# Altium PCB AutomatskoOsetljenjeV2.PcbDoc
Units mm, origin at the board's own origin, x right, y up, seen from the top; angles counter-clockwise.
Board outline 60 x 100 mm, 2 copper layers (Top Layer, Bottom Layer); 65 components, 31 nets, 176 pads, 36 vias.
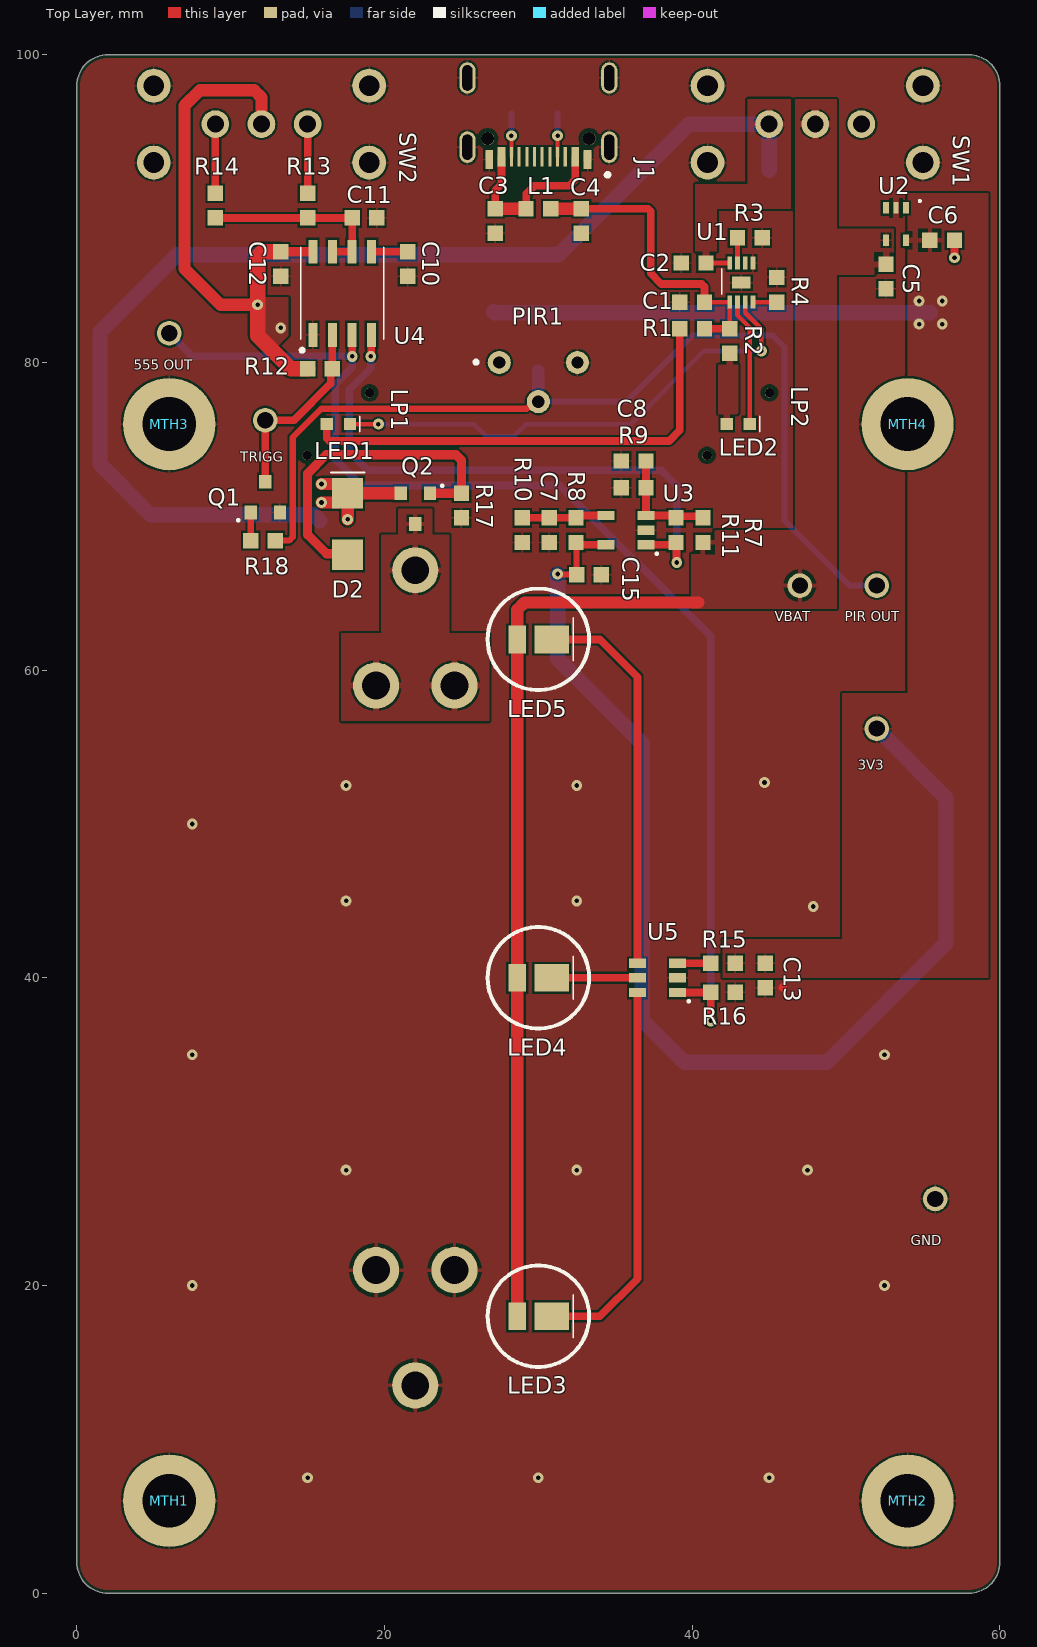
[diagram p0: Top Layer view]
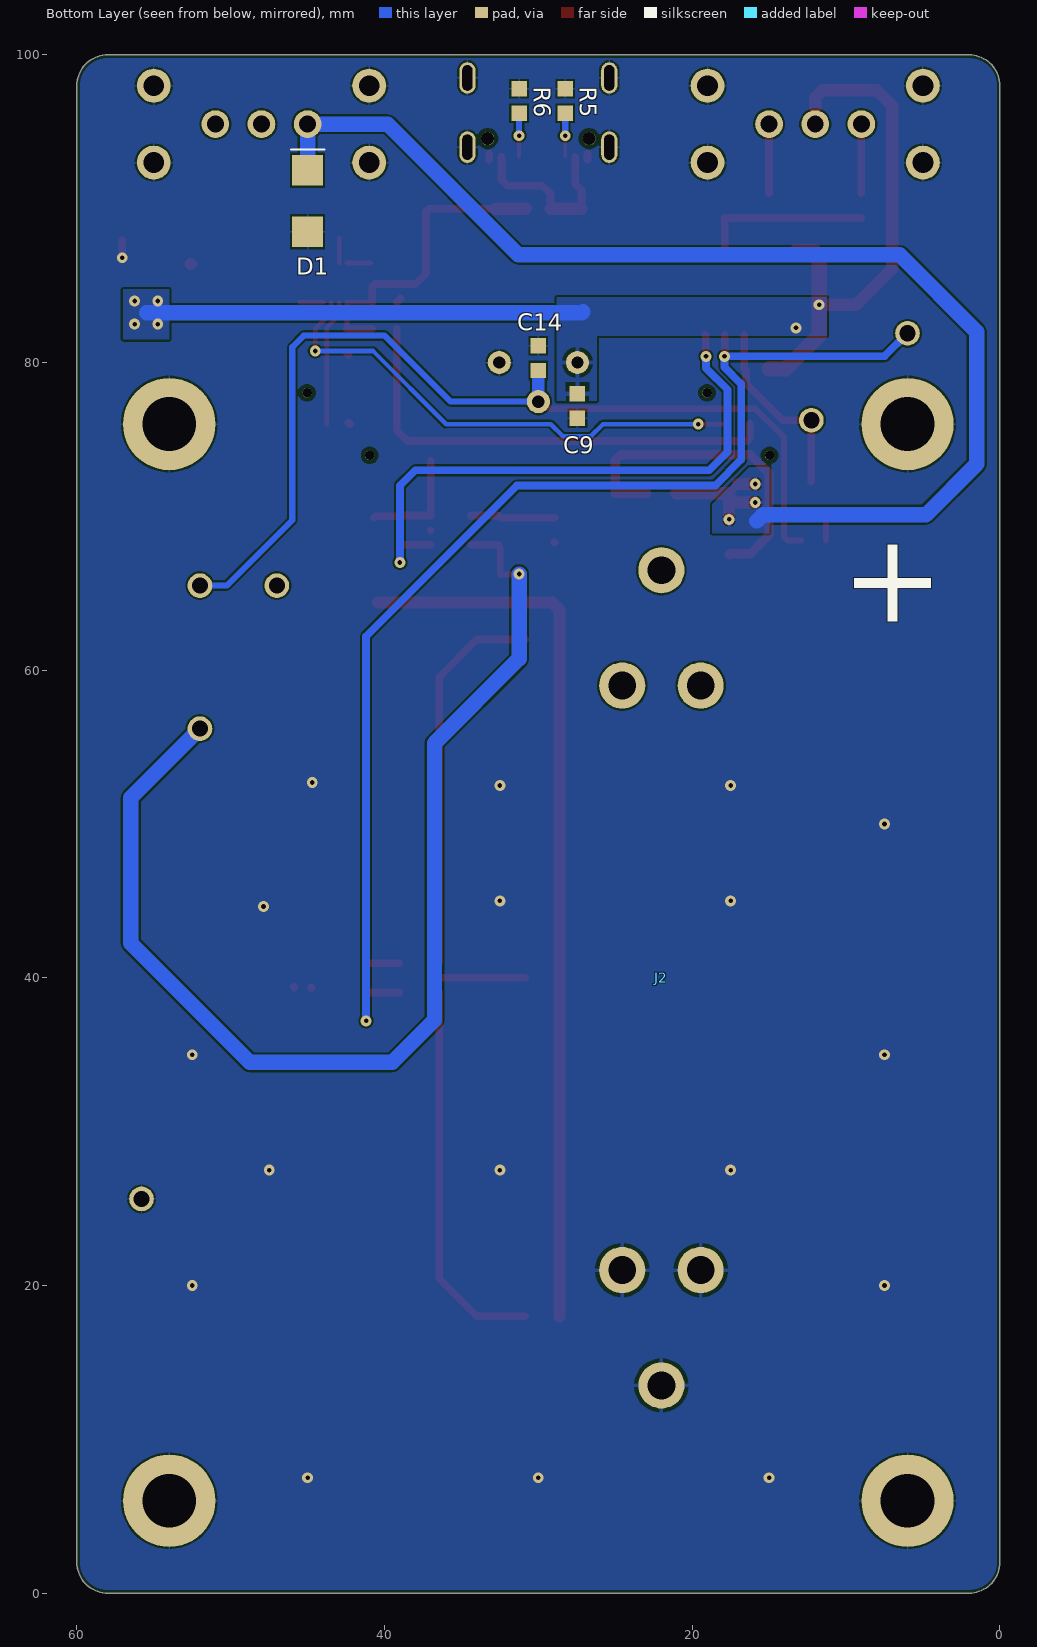
[diagram p1: Bottom Layer view, seen from below]

## Layer stack, top to bottom
Top Solder: solder mask 0.0102, Solder Resist, Dk 3.5
Top Layer: signal copper 0.0356
Dielectric 1: dielectric 0.32, FR-4, Dk 4.8
Bottom Layer: signal copper 0.0356
Bottom Solder: solder mask 0.0102, Solder Resist, Dk 3.5

## Board outline
2,0 cw(c2,2) 0,2 0,98 cw(c2,98) 2,100 58,100 cw(c58,98) 60,98 60,2 cw(c58,2) 58,0

## Design rules (kind name [scope] priority, off if disabled: settings)
BoardOutlineClearance [All] p1: gap=0.2 ignorepadtopadclearanceinfootprint=FALSE
Clearance [All] p1: gap=0.127 ignorepadtopadclearanceinfootprint=TRUE except(0.254: Arc-Hole Track-Hole SMDPad-Hole THPad-Hole Via-Hole Fill-Hole Poly-Hole Region-Hole Text-Hole)
ComponentClearance [All] p1: gap=0.127 collisioncheckmode=3 verticalgap=0.127 showdistances=TRUE
DiffPairsRouting [All] p1: maxlimit=0.254 minlimit=0.127 mostfreqgap=0.127 toplayer_minwidth=0.127 toplayer_maxwidth=25.4 toplayer_prefwidth=0.127 bottomlayer_minwidth=0.127 bottomlayer_maxwidth=25.4 bottomlayer_prefwidth=0.127 maxuncoupledlength=12.7
Height [All] p1: minheight=0 maxheight=1816.048 prefheight=12.7
HoleSize [All] p1: absolutevalues=TRUE maxlimit=6.3 minlimit=0.3 maxpercent=80.000 minpercent=20.000
HoleToHoleClearance [All] p1: gap=0.254 allowstackedmicrovias=FALSE
MinimumAnnularRing [All] p1: minimumring=0.152
MinimumSolderMaskSliver [All] p1: minsoldermaskwidth=0.152
PlaneClearance [All] p1: clearance=0.127
PlaneConnect PlaneConnectPowerPads [InPadClass('PowerPads')] p1: planeconnectstyle=Direct reliefexpansion=0.508 reliefentries=4 reliefconductorwidth=0.254 reliefairgap=0.254
PlaneConnect [All] p2: pad.planeconnectstyle=Relief pad.reliefexpansion=0.3 pad.reliefentries=4 pad.reliefconductorwidth=0.127 pad.reliefairgap=0.127 via.planeconnectstyle=Direct via.reliefexpansion=0.3 via.reliefentries=4 via.reliefconductorwidth=0.127 via.reliefairgap=0.127
PolygonConnect PolygonConnectPowerPads [All vs (InPadClass('PowerPads'))] p1: connectstyle=Relief reliefconductorwidth=0.254 reliefentries=4 polygonreliefangle="90 Angle" airgapwidth=0.254
PolygonConnect [All] p2: thpad.connectstyle=Relief thpad.reliefconductorwidth=0.127 thpad.reliefentries=4 thpad.polygonreliefangle="90 Angle" thpad.airgapwidth=0.127 smdpad.connectstyle=Relief smdpad.reliefconductorwidth=0.127 smdpad.reliefentries=4 smdpad.polygonreliefangle="90 Angle" smdpad.airgapwidth=0.127 via.connectstyle=Direct via.reliefconductorwidth=0.127 via.reliefentries=4 via.polygonreliefangle="90 Angle" via.airgapwidth=0.127
RoutingVias [All] p1: holewidth=0.3 width=0.6 viastyle="Through Hole" minholewidth=0.3 minwidth=0.6 maxholewidth=0.6 maxwidth=6.6
SilkToSilkClearance [All] p1: silktosilkclearance=0.127
SilkToSolderMaskClearance [IsPad] p1: minsilkscreentomaskgap=0.127 clearancetoexposedcopper=TRUE
SolderMaskExpansion [All] p1: expansion=0.051 istentingtop=FALSE
UnRoutedNet [All] p1: checkbadconnections=TRUE
Width Width_10mil [All] p1: maxlimit=25.4 minlimit=0.254 preferedwidth=0.254 minimp=50.000000 maximp=50.000000 favimp=50.000000
Width Width_6mil [All] p2: maxlimit=25.4 minlimit=0.152 preferedwidth=0.152 minimp=50.000000 maximp=50.000000 favimp=50.000000
Width Power_20mil [All] p3: maxlimit=25.4 minlimit=0.508 preferedwidth=0.508 minimp=50.000000 maximp=50.000000 favimp=50.000000
Width Power_12mil [All] p4: maxlimit=25.4 minlimit=0.305 preferedwidth=0.305 minimp=50.000000 maximp=50.000000 favimp=50.000000
Width Width_5mil [All] p5: maxlimit=25.4 minlimit=0.127 preferedwidth=0.127 minimp=50.000000 maximp=50.000000 favimp=50.000000
19 further rules are at their usual default settings.

## Components (designator, comment, footprint, x,y, rotation, side; value= is the part's Value field where it differs from the comment)
3V3 "TESTPOINT" TESTPOINT 52,56.2 r0 top locked (schematic designator TP2)
"555 OUT" "TESTPOINT" TESTPOINT 6,81.9 r0 top locked (schematic designator TP4)
C1 "1uF/16V" CAP_0603 40,83.93 r0 top locked
C2 "2.2uF/16V" CAP_0603 40.1,86.47 r0 top locked
C3 "10nF/10V" CAP_0603 27.2,89.2 r90 top locked
C4 "100nF/16V" CAP_0603 32.8,89.2 r90 top locked
C5 "1uF/16V" CAP_0603 52.6,85.6 r90 top locked
C6 "1uF/16V" CAP_0603 56.25,87.95 r180 top locked
C7 "1nF/100V" CAP_0603 30.7,69.1 r90 top locked
C8 "1nF/100V" CAP_0603 36.2,73.6 r0 top locked
C9 "100nF/16V" CAP_0603 27.46,77.175 r90 bottom locked
C10 "10nF/10V" CAP_0603 21.5,86.4 r90 top locked
C11 "10uF/10V" CAP_0603 18.7,89.4 r180 top locked
C12 "100nF/16V" CAP_0603 13.25,86.4 r90 top locked
C13 "1uF/16V" CAP_0603 44.75,40.15 r90 top locked
C14 "330pF/50V" CAP_0603 30,80.285 r270 bottom locked
C15 "100nF/16V" CAP_0603 33.3,66.2 r180 top locked
D1 "ZENER/5.1V" ZENER_SMA 45,90.5 r270 bottom locked
D2 "ZENER/5.1V" ZENER_SMA 17.6,69.5 r270 top locked
GND "TESTPOINT" TESTPOINT 55.8,25.625 r0 top locked (schematic designator TP5)
J1 "GSB1C4K11DVHR" USBC_GSB1C4K11DVHR 30,97 r180 top locked
J2 "12BHC186CLP-GR" BATTERY_HOLDER_18650 22,40 r270 bottom locked
L1 "33R/100MHz" INDC_0603 30,90 r0 top locked
LED1 "150060RS75000" LED_0603 17,76 r180 top locked
LED2 "150060VS75000" LED_0603 43,76 r180 top locked
LED3 "JB2835BWT-N-U65EA0000-N000P001" LED_1411 30,18 r180 top locked
LED4 "JB2835BWT-N-U65EA0000-N000P001" LED_1411 30,40 r180 top locked
LED5 "JB2835BWT-N-U65EA0000-N000P001" LED_1411 30,62 r180 top locked
LP1 "LIGHT_PIPE" LIGHT_PIPE_VLP-400-F 17,76 r0 top locked
LP2 "LIGHT_PIPE" LIGHT_PIPE_VLP-400-F 43,76 r0 top locked
MTH1 "MTH" MOUNTING_HOLE_M3 6,6 r0 top locked
MTH2 "MTH" MOUNTING_HOLE_M3 54,6 r0 top locked
MTH3 "MTH" MOUNTING_HOLE_M3 6,76 r0 top locked
MTH4 "MTH" MOUNTING_HOLE_M3 54,76 r0 top locked
PIR1 "AM312" AM312 30,80 r0 top locked
"PIR OUT" "TESTPOINT" TESTPOINT 52,65.5 r0 top locked (schematic designator TP6)
Q1 "BSS806NH6327XTSA1" SOT23-3 12.25,71.25 r0 top locked
Q2 "TSM650P02CX RFG" SOT23-3 22,70.5 r180 top locked
R1 "250R/0.1%" RES_0603 40,82.2 r0 top locked
R2 "250R/0.1%" RES_0603 42.438,81.4 r90 top locked
R3 "3K3/1%" RES_0603 43.746,88.1 r180 top locked
R4 "1K/1%" RES_0603 45.5,84.73 r270 top locked
R5 "5.1K/1%" RES_0603 28.251,97 r270 bottom locked
R6 "5.1K/1%" RES_0603 31.251,97 r270 bottom locked
R7 "10K/1%" RES_0603 40.7,69.1 r270 top locked
R8 "10K/1%" RES_0603 32.45,69.1 r270 top locked
R9 "9.1K/1%" RES_0603 36.2,71.85 r0 top locked
R10 "10K/1%" RES_0603 28.95,69.1 r90 top locked
R11 "300K/1%" RES_0603 38.95,69.1 r270 top locked
R12 "10K/1%" RES_0603 15.8,79.6 r180 top locked
R13 "1M/1%" RES_0603 15,90.2 r90 top locked
R14 "270k/1%" RES_0603 9,90.2 r90 top locked
R15 "9.1K/1%" RES_0603 42,40.95 r180 top locked
R16 "100K/1%" RES_0603 42,39.05 r180 top locked
R17 "100K/1%" RES_0603 25,70.7 r90 top locked
R18 "100R/1%" RES_0603 12.1,68.425 r180 top locked
SW1 "SK-12F17-G 7" SWITCH_SK-12F17-G_HORIZONTAL 48,95.5 r180 top locked
SW2 "SWITCH_MAIN" SWITCH_SK-12F17-G_HORIZONTAL 12,95.5 r180 top locked
TRIGG "TESTPOINT" TESTPOINT 12.25,76.25 r0 top locked (schematic designator TP3)
U1 "MC34673AEPR2" "UDFN 8" 43.2,85.2 r90 top locked
U2 "STLQ50/3.3V" SOT323-5 53.25,89 r180 top locked
U3 "TLV3201AIDBVT" SOT23-5 35.7,69.1 r180 top locked
U4 "TLC555IDR" 8-SOIC 17.25,84.5 r90 top locked
U5 "MAX1916EZT+T" SOT23-6 37.75,40 r180 top locked
VBAT "TESTPOINT" TESTPOINT 47,65.5 r0 top locked (schematic designator TP1)

## Footprints (in the part's own frame and the unit in brackets; to place one, negate y for a bottom-side part, rotate by r counter-clockwise, add the part's x,y. Pads: shape width x height; smd on the part's side, far side on the other; paste and mask are expansions set on the pad)
8-SOIC [mm]
  rect 1.55x0.6 smd: 1(-2.7,1.905) 2(-2.7,0.635) 3(-2.7,-0.635) 4(-2.7,-1.905) 5(2.7,-1.905) 6(2.7,-0.635) 7(2.7,0.635) 8(2.7,1.905)
  silkscreen extent -3.8,-2.7 3,2.7, body extent -3,-2.45 3,2.45, height 1.75
AM312 [mm]
  round 1.5 hole 0.8: 1(-2.54,0) 2(0,-2.54) 3(2.54,0)
  silkscreen extent -4.15,-0.07 -3.95,0.12, body extent -6.7,-6.7 6.7,6.7, height 10
BATTERY_HOLDER_18650 [mm]
  round 3 hole 1.8: 1(-26.5,0) 1(-19,-2.55) 1(-19,2.55) 2(19,-2.55) 2(19,2.55) 2(26.5,0)
  body extent -34.87,-9.58 34.87,9.58, height 19.43
CAP_0603 [mm]
  rect 1x1 smd: 1(-0.8,0) 2(0.8,0)
  body extent -0.8,-0.43 0.8,0.43, height 0.6
INDC_0603 [mm]
  rect 1x1 smd: 1(-0.8,0) 2(0.8,0)
  body extent -0.8,-0.43 0.8,0.43, height 0.6
LED_0603 [mm]
  rect 0.8x0.8 smd: 1(0.75,0) 2(-0.75,0)
  silkscreen extent -1.4,-0.5 -1.4,0.5, body extent -0.8,-0.4 0.8,0.4, height 0.8
LED_1411 [mm]
  rect 1.15x1.8 smd: 1(1.37,0)
  rect 2.25x1.8 smd: 2(-0.87,0)
  silkscreen extent -2.27,-1.4 -2.27,1.4, body extent -1.75,-1.4 1.75,1.4, height 0.71
LIGHT_PIPE_VLP-400-F [mil]
  round 24 hole 24: 1(-80,-80) 1(80,80)
  body extent -92,-92 92,93, height 400
MOUNTING_HOLE_M3 [mm]
  round 6 hole 3.5: 1(0,0)
RES_0603 [mm]
  rect 1x1 smd: 1(-0.8,0) 2(0.8,0)
  body extent -0.8,-0.43 0.8,0.43, height 0.6
SOT23-3 [mm]
  rect 0.8x0.9 smd: 1(-0.95,-1) 2(0.95,-1) 3(0,1)
  silkscreen extent -1.77,-1.52 -1.73,-1.48, body extent -1.52,-1.32 1.52,1.32, height 1.22
SOT23-5 [mm]
  rect 1.1x0.6 smd: 1(-1.3,0.95) 2(-1.3,0) 3(-1.3,-0.95) 4(1.3,-0.95) 5(1.3,0.95)
  silkscreen extent -2.02,1.51 -1.98,1.54, body extent -1.4,-1.45 1.4,1.45, height 1.45
SOT23-6 [mm]
  rect 1.1x0.6 smd: 1(-1.3,0.95) 2(-1.3,0) 3(-1.3,-0.95) 4(1.3,-0.95) 5(1.3,0) 6(1.3,0.95)
  silkscreen extent -2.05,1.5 -2,1.55, body extent -1.4,-1.45 1.4,1.45, height 1.2
SOT323-5 [mm]
  rect 0.4x0.75 smd: 1(-0.65,-1.05) 3(0.65,-1.05) 4(0.65,1.05) 5(-0.65,1.05)
  rect 0.35x0.75 smd: 2(0,-1.05)
  silkscreen extent -1.55,-1.5 -1.55,-1.5, body extent -1.1,-1.09 1.1,1.29, height 1.09
SWITCH_SK-12F17-G_HORIZONTAL [mm]
  round 1.8 hole 1.1: 1(0,0) 2(-3,0) 3(3,0)
  round 2.2 hole 1.35: 4(-7,-2.5) 4(-7,2.5) 4(7,-2.5) 4(7,2.5)
  body extent -7.56,-8.17 7.56,2.8, height 8.07
TESTPOINT [mm]
  round 1.6 hole 1.05: 1(0,0)
  body extent -1.27,-1.27 1.27,1.27, height 4.57
"UDFN 8" [mil]
  rect 34x12 smd mask+0.79: 1(-50,29.53) 2(-50,9.84) 3(-50,-9.84) 4(-50,-29.53) 5(50,-29.53) 6(50,-9.84) 7(50,9.84) 8(50,29.53)
  rect 31x47 smd: 9(0,0)
  silkscreen extent -30,50 35,50, body extent -60,-40 60,40, height 19
USBC_GSB1C4K11DVHR [mm]
  rect 0.5x1.25 smd mask+0.05: A1_B12(-3.2,3.8) A4_B9(-2.4,3.625) B1_A12(3.2,3.8) B4_A9(2.4,3.625)
  rect 0.2x1.25 smd mask+0.05: A5(-1.25,3.625) A6(-0.25,3.625) A7(0.25,3.625) A8(1.25,3.625) B5(1.75,3.625) B6(0.75,3.625) B7(-0.75,3.625) B8(-1.75,3.625)
  oval 1.05x2.05 hole 0.65 slot 1.65 at 90 deg: SH(-4.61,3) SH(-4.61,-1.5) SH(4.61,3) SH(4.61,-1.5)
  round 0.85 hole 0.85 unplated: ""(-3.3,2.44) ""(3.3,2.44)
  silkscreen extent -4.6,4.7 -4.4,4.9, body extent -4.74,-4.4 4.74,4, height 6.69
ZENER_SMA [mm]
  rect 2x2 smd: 1(2,0) 2(-2,0)
  silkscreen extent -3.35,-1.1 -3.35,1.1, body extent -2.6,-1.31 2.6,1.31, height 2.21

## Part data
3V3 "555 OUT" GND "PIR OUT" TRIGG VBAT: "White PC Test Point, Miniature Phosphor Bronze Silver Plating Through Hole Mounting Type", MPN=5002
C1 C5 C6 C13: "1 µF ±5% 16V Ceramic Capacitor X7R 0603 (1608 Metric)", MPN=0603YC105JAT2A
C2: "2.2 µF ±10% 16V Ceramic Capacitor X7S 0603 (1608 Metric)", MPN=GRM188C71C225KE11D
C3 C10: "10000 pF ±10% 50V Ceramic Capacitor X7R 0603 (1608 Metric)", MPN=0603B103K500CT
C4 C9 C12 C15: "0.1 µF ±10% 16V Ceramic Capacitor X7R 0603 (1608 Metric)", MPN=CC0603KRX7R7BB104
C7 C8: "1 µF ±10% 10V Ceramic Capacitor X7R 0603 (1608 Metric)", MPN=CL10B105KP8NNNC
C11: "10 µF ±10% 10V Ceramic Capacitor X5R 0603 (1608 Metric)", MPN=CL10A106KP8NNNC
C14: "330 pF ±10% 50V Ceramic Capacitor X7R 0603 (1608 Metric)", MPN=C0603C331K5RACTU
D1 D2: "Zener Diode 5.1 V 1.5 W ±5% Surface Mount SMA", MPN=1SMA5918BT3G
J1: library part USB_C_GSB1C4K11DVHR, "USB-C (USB TYPE-C) USB 2.0 Receptacle Connector 24 (16+8 Dummy) Position Through Hole, Right Angle", MPN=GSB1C4K11DVHR
J2: library part BATTERY_HOLDER_18650, "Cylindrical Battery Contacts, Clips, Holders & Springs 18650 Holder Board Mount Clip", MPN=12BHC186CLP-GR
L1: "33 Ohms @ 100 MHz 1 Power Line Ferrite Bead 0603 (1608 Metric) 3A 25mOhm", MPN=BLM18PG330SN1DBLM18PG330SN1D
LED1: library part INDICATION_LED_RED_1500_1, "Red 625nm LED Indication - Discrete 2V 0603 (1608 Metric)", MPN=150060RS75000
LED2: library part INDICATION_LED_GREEN_1500, "Green 570nm LED Indication - Discrete 2V 0603 (1608 Metric)", MPN=150060VS75000
LED3 LED4 LED5: library part "LED COOL WHITE", "LED Lighting J White, Cool 6500K 3-Step MacAdam Ellipse 2.7V 55mA 120° 1411 (3528 Metric)", MPN=JB2835BWT-N-U65EA0000-N000P001
LP1 LP2: "Light pipe for indication led", MPN=VLP-400-F
MTH1 MTH2 MTH3 MTH4: "Mounting hole"
PIR1: "AM312 PIR sensor", ComponentLink1Description=MPN, ComponentLink1URL=RAK12006-0-WB-N
Q1: library part BSS806NH6327XTSA1_NMOS, "N-Channel 20 V 2.3A (Ta) 500mW (Ta) Surface Mount PG-SOT23", MPN=BSS806NH6327XTSA1
Q2: library part "TSM650P02CX RFG PMOS", "P-Channel 20 V 4.1A (Tc) 1.56W (Tc) Surface Mount SOT-23", MPN="TSM650P02CX RFG"
R1 R2: "250 Ohms ±0.1% 0.1W, 1/10W Chip Resistor 0603 (1608 Metric) Thin Film", MPN=RT0603BRE07250RL
R3: "3.3 kOhms ±1% 0.1W, 1/10W Chip Resistor 0603 (1608 Metric) Automotive AEC-Q200 Thick Film", MPN=RMCF0603FT3K30
R4: "1 kOhms ±1% 0.1W, 1/10W Chip Resistor 0603 (1608 Metric) Moisture Resistant Thick Film", MPN=RC0603FR-071KL
R5 R6: "5.1 kOhms ±1% 0.1W, 1/10W Chip Resistor 0603 (1608 Metric) Moisture Resistant Thick Film", MPN=RC0603FR-075K1L
R7 R8 R10 R12: "10 kOhms ±1% 0.1W, 1/10W Chip Resistor 0603 (1608 Metric) Moisture Resistant Thick Film", MPN=CR0603-FX-1002ELF
R9 R15: "9.1 kOhms ±1% 0.1W, 1/10W Chip Resistor 0603 (1608 Metric) Thick Film", MPN=CRCW06039K10FKEAC
R11: "300 kOhms ±1% 0.1W, 1/10W Chip Resistor 0603 (1608 Metric) Automotive AEC-Q200 Thick Film", MPN=RMCF0603FT300K
R13: "1 MOhms ±1% 0.1W, 1/10W Chip Resistor 0603 (1608 Metric) Automotive AEC-Q200 Thick Film", MPN=RMCF0603FT1M00
R14: "270 kOhms ±1% 0.1W, 1/10W Chip Resistor 0603 (1608 Metric) Automotive AEC-Q200 Thick Film", MPN=ERJ-3EKF2703V
R16 R17: "100 kOhms ±1% 0.1W, 1/10W Chip Resistor 0603 (1608 Metric) Automotive AEC-Q200 Thick Film", MPN=ERJ-3EKF1003V
R18: "100 Ohms ±1% 0.1W, 1/10W Chip Resistor 0603 (1608 Metric) Automotive AEC-Q200 Thick Film", MPN=ERJ-3EKF1000V
SW1: library part SWITCH_MAIN, "SWITCH SLIDE SPDT 300MA 30V", MPN="SK-12F17-G 7"
SW2: "SWITCH SLIDE SPDT 300MA 30V", MPN="SK-12F17-G 7"
U1: "Charger IC Lithium Ion/Polymer 8-UDFN (3x2)", MPN=MC34673AEPR2
U2: library part REG-STLQ50/3.3V, "IC REG LINEAR 3.3V 50MA SOT323-5", MPN=STLQ50C33R
U3: library part TLV3201AIDBVT_COMPARATOR, "Comparator General Purpose Push-Pull SOT-23-5", MPN=TLV3201AIDBVT
U4: "555 Type, Timer/Oscillator (Single) IC 2.1MHz 8-SOIC", MPN=TLC555IDR
U5: library part "LED DRIVER MAX1916", "LED Driver IC 3 Output Linear Dimming 60mA TSOT-23-6", MPN=MAX1916EZT+T

## Via types
v1: diameter 0.7, hole 0.3, Top Layer to Bottom Layer, tented both sides, 35 vias
v2: diameter 0.7, hole 0.3, Top Layer to Bottom Layer, 1 vias

## Nets (pads, with @x,y where several pads share a name; then routed paths per layer and width w, separated by ;. In a path a pad name is that pad's centre, name@x,y a point inside that pad or via, vN(x,y) a via of type N, cw(c..) or ccw(c..) an arc to the next point about the centre after c; other vN are vias at no path point)
555_SIGNAL: "555 OUT.1" R16.2 U4.3 U5.1 | length 79.2
  Top Layer w0.5: U4.3 17.893,81.793 17.893,80.407 v1(17.9,80.4) ; U5.1 R16.2 v1(41.2,37.2)
  Bottom Layer w0.5: 6,81.9 7.5,80.4 v1(17.9,80.4) 17.9,79.7 16.8,78.6 16.8,73.7 18.5,72 31.4,72 41.2,62.2 v1(41.2,37.2)
+3V3: 3V3.1 C6.2 C9.2 C12.2 C13.2 C15.2 PIR1.1 R8.2 R12.2 R15.1 SW2.1 U2.5 U3.5 U4.8 | length 141.3
  Top Layer w0.4: v2(31.25,66.25) 31.275,66.225 C15.2@32.475,66.225 ; C15.2 C15.2@32.475,66.225 ; R8.2@32.6,68.15 32.475,68.025 C15.2@32.475,66.225
  Top Layer w0.5: R8.2@32.6,68.15 U3.5
  Top Layer w0.6: C12.2 U4.8
  Top Layer w0.8: v1(11.75,83.75) 9.35,83.75 7,86.1 7,96.7 8,97.7 11.531,97.7 12,97.231 SW2.1
  Top Layer w1: C12.2 12.043,87.2 11.75,86.907 v1(11.75,83.75) 11.75,81.75 13.9,79.6 R12.2
  Bottom Layer w1: 27.1,83.3 27.175,83.225 55.475,83.225 ; v2(31.25,66.25) 31.25,60.75 36.75,55.25 36.75,37.25 39.5,34.5 48.75,34.5 56.5,42.25 56.5,51.7 3V3.1
  other v1: 13.25,82.25 54.75,82.5 56.25,82.5 54.75,84 56.25,84
+BAT: C2.2 D1.2 D2.2 Q2.2 SW1.3 U1.8 | length 87.1
  Top Layer w0.3: C2.2 U1.8@42.438,86.47
  Top Layer w0.5: D2.2@17,70.9 D2.2 D2.2@17,72.1
  Top Layer w0.8: v1(15.9,70.9) D2.2@17,70.9 ; v1(15.9,72.1) D2.2@17,72.1 ; v1(17.6,69.8) D2.2 Q2.2
  Bottom Layer w1: 15.8,69.7 15.4,70.1 4.8,70.1 1.5,73.4 1.5,82 6.5,87 31.3,87 39.8,95.5 SW1.3 D1.2
CHG: LED1.2 U1.3 | length 33
  Top Layer w0.3: LED1.2 v1(19.6,76) ; U1.3@43.454,83.93 43.454,83.246 44.5,82.2 v1(44.5,80.75)
  Bottom Layer w0.3: v1(19.6,76) 25.8,76 26.6,75.2 28.4,75.2 29.2,76 36,76 40.75,80.75 v1(44.5,80.75)
GND: C1.1 C2.1 C3.1 C4.1 C5.1 C6.1 C7.1 C8.1 C9.1 C10.1 C11.1 C12.1 C13.1 C14.1 C15.1 D1.1 GND.1 J1.A1_B12 J1.B1_A12 J1.SH J2.2 MTH1.1 MTH2.1 MTH3.1 MTH4.1 PIR1.3 Q1.2 R3.1 R4.1 R5.1 R6.1 R9.1 R10.1 R16.1 R17.1 SW1.4 SW2.4 U1.5 U1.9 U2.2 U3.2 U4.1 U5.2 | length 3.8
  Top Layer w0.5: SW2.4@19,92.54 SW2.4@19,93 ; J1.SH@25.39,94 25.39,93.829 J1.SH@25.644,93.575 ; J1.B1_A12 J1.B1_A12@26.8,93.575 ; J1.A1_B12 J1.A1_B12@33.2,93.575 ; J1.SH@34.356,93.575 34.61,93.829 J1.SH@34.61,94 ; C1.1@38.966,84.164 C1.1 ; C13.1 C13.1@44.775,39.375 ; 45.875,39.375 45.9,39.4 ; C6.1 57.053,87.947 57.053,86.807 v1(57.056,86.804)
  other v1: 15,7.5 30,7.5 45,7.5 7.5,20 52.5,20 17.5,27.5 32.5,27.5 47.5,27.5 7.5,35 52.5,35 47.866,44.634 17.5,45 32.5,45 7.5,50 17.5,52.5 32.5,52.5 44.7,52.7
NetC7_2: C7.2 R8.1 R10.2 U3.4 | length 5.5
  Top Layer w0.5: R10.2 C7.2 R8.1 32.6,70.05 U3.4
NetC8_2: C8.2 R7.1 R9.2 R11.1 U3.3 | length 7.5
  Top Layer w0.5: C8.2 R9.2 U3.3 38.8,70.05 R11.1 38.95,70 40.6,70 R7.1
NetC10_2: C10.2 U4.5 | length 2.3
  Top Layer w0.5: U4.5 C10.2
NetC11_2: C11.2 R13.1 R14.1 U4.6 U4.7 | length 12.4
  Top Layer w0.5: R14.1 C11.2 ; U4.7 U4.6 17.893,87.208 C11.2@17.893,89.393
NetD2_1: D2.1 Q2.1 R17.2 | length 22
  Top Layer w0.6: D2.1 17.534,67.566 16.234,67.566 15,68.8 15,72.785 16.215,74 24.649,74 25,73.649 R17.2 Q2.1
NetJ1_A5: J1.A5 R6.2 | length 2.8
  Top Layer w0.254: J1.A5 v1(31.25,94.75)
  Bottom Layer w0.4: v1(31.25,94.75) R6.2@31.25,96.2
NetJ1_B5: J1.B5 R5.2 | length 2.8
  Top Layer w0.254: J1.B5 v1(28.25,94.75)
  Bottom Layer w0.254: R5.2 R5.2
  Bottom Layer w0.4: v1(28.25,94.75) R5.2
NetJ2_1: J2.1 Q2.3
NetLED1_1: LED1.1 R1.1 | length 30.8
  Top Layer w0.5: LED1.1 16.25,75.076 16.426,74.9 38.5,74.9 39.2,75.6 R1.1
NetLED2_1: LED2.1 R2.1 | length 0.3
  Top Layer w0.5: LED2.1 LED2.1@42.344,76.094 ; R2.1@42.344,80.506 R2.1
NetLED3_2: LED3.2 U5.6 | length 25.2
  Top Layer w0.5: LED3.2 34,18 36.45,20.45 U5.6
NetLED4_2: LED4.2 U5.5 | length 5.6
  Top Layer w0.5: LED4.2 U5.5
NetLED5_2: LED5.2 U5.4 | length 25.2
  Top Layer w0.5: LED5.2 34,62 36.45,59.55 U5.4
NetQ1_1: Q1.1 R18.2 | length 1.8
  Top Layer w0.4: R18.2 Q1.1
NetQ1_3: Q1.3 R12.1 TRIGG.1 U4.2 | length 12.4
  Top Layer w0.5: Q1.3 TRIGG.1 14.114,76.25 16.507,78.643 16.507,79.507 R12.1 ; R12.1@16.608,79.608 16.608,81.793 U4.2
NetR3_2: R3.2 U1.7 | length 1.6
  Top Layer w0.3: U1.7@42.946,86.47 R3.2
NetR4_2: R4.2 U1.4 | length 1.5
  Top Layer w0.3: U1.4@43.962,83.93 R4.2
NetR11_2: R11.2 U3.1 U4.4 | length 38.7
  Top Layer w0.5: v1(19.1,80.4) 19.128,80.427 19.128,81.773 U4.4 ; U3.1 38.8,68.15 R11.2 38.975,68.275 38.975,67.025 v1(39,67)
  Bottom Layer w0.5: v1(19.1,80.4) 19.1,79.625 17.7,78.225 17.7,74.2 18.9,73 38,73 39,72 v1(39,67)
NetR13_2: R13.2 SW2.2 | length 4.5
  Top Layer w0.5: R13.2 SW2.2
NetR14_2: R14.2 SW2.3 | length 4.5
  Top Layer w0.5: R14.2 SW2.3
NetR15_2: R15.2 U5.3 | length 2.1
  Top Layer w0.5: U5.3 R15.2
PIR: "PIR OUT.1" C14.2 PIR1.2 R18.1 | length 63.8
  Top Layer w0.4: R18.1 13.795,68.425 14.029,68.659 14.029,75.129 15.9,77 29.242,77 29.702,77.46 PIR1.2
  Bottom Layer w0.4: PIR1.2 35.71,77.46 40,81.75 45.25,81.75 46,81 46,69.75 50.25,65.5 52,65.5
  Bottom Layer w0.8: PIR1.2 C14.2
PPR: LED2.2 U1.2 | length 8.3
  Top Layer w0.3: U1.2@42.946,83.93 42.946,83.084 43.75,82.28 LED2.2
VBAT: C5.2 LED3.1 LED4.1 LED5.1 R7.2 SW1.1 U2.4 VBAT.1 | length 57.9
  Top Layer w0.8: LED3.1 LED4.1 LED5.1 28.63,63.931 29.099,64.4 40.4,64.4
VBUS: C3.2 J1.A4_B9 J1.B4_A9 L1.1 | length 11.6
  Top Layer w0.5: C3.2 27.2,91.2 27.6,91.6 J1.B4_A9 ; L1.1 29.207,90.007 29.207,90.957 29.75,91.5 32,91.5 32.4,91.9 J1.A4_B9
  Top Layer w0.8: C3.2 L1.1
VBUS_FILTER: C1.2 C4.2 L1.2 R1.2 R2.2 U1.1 | length 20.5
  Top Layer w0.3: C1.2 42.438,83.93 R2.2
  Top Layer w0.5: C4.2 37.124,90 37.3,89.824 37.3,85.8 38,85.1 40.624,85.1 40.8,84.924 C1.2 ; R1.2 R2.2
  Top Layer w0.8: L1.2 C4.2
pads on no net: J1. J1.A6 J1.A7 J1.A8 J1.B6 J1.B7 J1.B8 LP1.1 LP2.1 SW1.2 U1.6 U2.1 U2.3

## Polygon pours and split planes (outlines as drawn)
+3V3 on Top Layer "+3V3_L01_P008" (solid, pour order 8): 54,58.5 49.75,58.5 49.75,42.5 42,42.5 42,40 54,40 59.25,40 59.25,91 54,91
GND on Top Layer "GND_L01_P028" (solid, remove dead copper, pour order 28): 0,100 60,100 60,0 0,0
VBAT on Top Layer "VBAT_L01_P021" (solid, pour order 21): 49.4,88.7 53.1,88.7 53.1,87.35 53.1,85.7 49.4,85.7 49.4,64 39.95,64 39.95,69.1 46.7,69.1 46.7,97.1 49.4,97.1
NetJ2_1 on Top Layer "NETJ2_1_L01_P018" (solid, remove dead copper, pour order 18): 20.9,70.5 20.9,68.8 19.8,68.8 19.8,62.4 17.2,62.4 17.2,56.7 26.8,56.7 26.8,62.4 24.2,62.4 24.2,68.8 23.1,68.8 23.1,70.5
+BAT on Top Layer "+BAT_L01_P023" (solid, pour order 23): 40.2,86.045 41.6,86.045 41.6,90 46.4,90 46.4,97.125 43.6,97.125 43.6,91.6 40.2,91.6
+3V3 on Top Layer "+3V3_L01_P013" (solid, pour order 13): 12,84.25 13.75,84.25 13.75,81.75 13,81 12,81
NetLED2_1 on Top Layer "NETLED2_1_L01_P026" (solid, remove dead copper, pour order 26): 41.7,80.506 43,80.506 43,76 41.7,76
+BAT on Bottom Layer "+BAT_L02_P024" (solid, pour order 24): 15,73.2 15,68.9 18.7,68.9 18.7,70.8 16.3,73.2
GND on Bottom Layer "GND_L02_P029" (solid, pour order 29): 0,101 61,101 61,0 0,0
+3V3 on Bottom Layer "+3V3_L02_P022" (solid, pour order 22): 54,84.75 57,84.75 57,81.5 54,81.5
+3V3 on Bottom Layer "+3V3_L02_P014" (solid, remove dead copper, pour order 14): 28.8,77.5 26.2,77.5 26.2,81.75 11.25,81.75 11.25,84.25 28.8,84.25

## Silkscreen, mask and mechanical layers (free items; w line width, h text height)
Top Overlay:
  circle w0.254: c30,18 r3.3
  circle w0.254: c30,40 r3.3
  circle w0.254: c30,62 r3.3
Board:
  lines w0.1: 60,98 60,98 ; 60,98 60,98 ; 60,2 60,2
  lines w0.254: 0,2 ccw(c2,2) 2,0 58,0 ccw(c58,2) 60,2 60,98 ccw(c58,98) 58,100 2,100 ccw(c2,98) 0,98 0,2

## Text inside footprints (layer, text, board x,y; h text height)
J1: Top Assembly "PCB Edge" at 33,99 h0.81 r180
J2: Bottom Overlay "+" at 11.388,69 h10 r90